# EAGLE board LED_array (EAGLE 9.1.2)
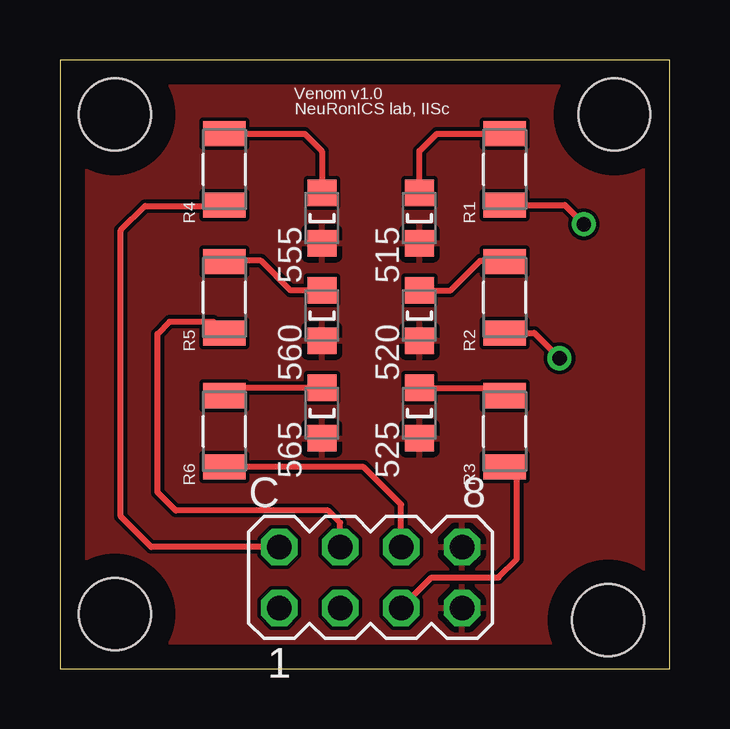
[diagram p0: board, top side]
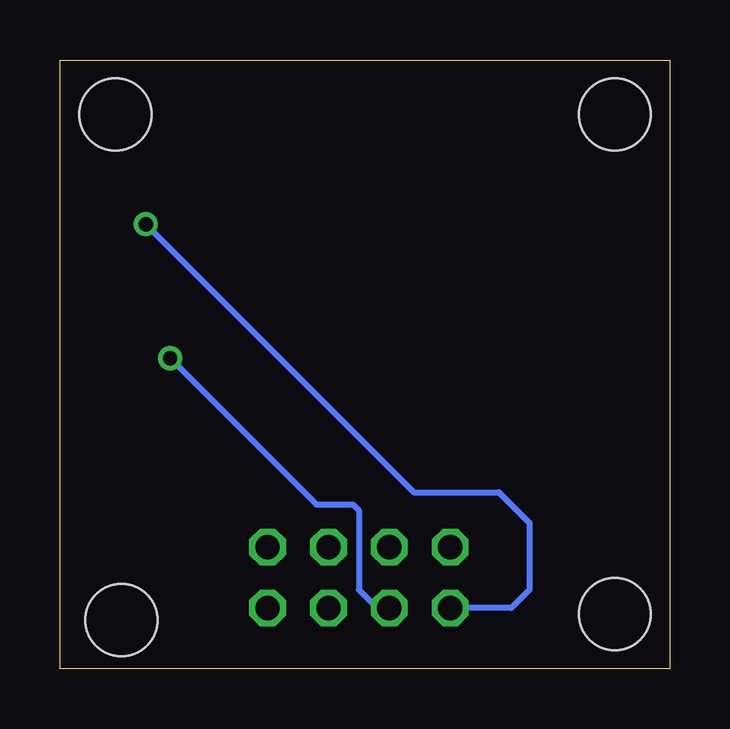
[diagram p1: board, bottom side, seen from below]

Size 25.42 x 25.39 mm. Coordinates in mm from the lower left corner, seen from the top.
Outline: 0,0 25.42,0 25.42,25.39 0,25.39 0,0
Copper layers (1*16): Top 0.035mm / dielectric 1.5mm / Bottom 0.035mm
Design rules "default": minimum track width 6mil, minimum drill 0.35mm, track to track 6mil, track to pad 6mil, pad to pad 6mil, via to via 6mil, smd to smd 6mil, copper to edge 40mil, drill to drill 6mil, minimum pad ring 10mil, minimum via ring 8mil, stop-mask expansion 4mil, vias tented up to drill 0mil, thermal gap 10mil
Holes 3 mm at 2.29,2.29 22.86,2.03 23.11,23.11 2.29,23.11

## Footprints (pad centres in the part's own frame; a part is rotated, then mirrored left to right if it is on the bottom)
WUERTH_ELEKTRONIK_150080GS75000_0 = smd 1.1 x 1.2: 1 -1.05,0; 2 1.05,0
MA04-2 = drill 1.016 octagon: 1 -3.81,-1.27; 2 -3.81,1.27; 3 -1.27,-1.27; 4 -1.27,1.27; 5 1.27,-1.27; 6 1.27,1.27; 7 3.81,-1.27; 8 3.81,1.27
RESC3116X65N = smd 1.05 x 1.77: 1 -1.485,0; 2 1.485,0

## Placement (x,y rotation side)
515  WUERTH_ELEKTRONIK_150080GS75000WUERTH_ELEKTRONIK_150080GS75000_0_0  [WUERTH_ELEKTRONIK_150080GS75000_0]  14.99,18.8 90 top
520  WUERTH_ELEKTRONIK_150080GS75000WUERTH_ELEKTRONIK_150080GS75000_0_0  [WUERTH_ELEKTRONIK_150080GS75000_0]  14.99,14.73 90 top
525  WUERTH_ELEKTRONIK_150080GS75000WUERTH_ELEKTRONIK_150080GS75000_0_0  [WUERTH_ELEKTRONIK_150080GS75000_0]  14.99,10.67 90 top
555  WUERTH_ELEKTRONIK_150080GS75000WUERTH_ELEKTRONIK_150080GS75000_0_0  [WUERTH_ELEKTRONIK_150080GS75000_0]  10.92,18.8 90 top
560  WUERTH_ELEKTRONIK_150080GS75000WUERTH_ELEKTRONIK_150080GS75000_0_0  [WUERTH_ELEKTRONIK_150080GS75000_0]  10.92,14.73 90 top
565  WUERTH_ELEKTRONIK_150080GS75000WUERTH_ELEKTRONIK_150080GS75000_0_0  [WUERTH_ELEKTRONIK_150080GS75000_0]  10.92,10.67 90 top
C  [MA04-2]  12.95,3.81 0 top
R1  100  [RESC3116X65N]  18.54,20.83 90 top
R2  100  [RESC3116X65N]  18.54,15.49 90 top
R3  100  [RESC3116X65N]  18.54,9.91 90 top
R4  150  [RESC3116X65N]  6.86,20.83 90 top
R5  150  [RESC3116X65N]  6.86,15.49 90 top
R6  150  [RESC3116X65N]  6.86,9.91 90 top

## Library data of the parts
515 520 525 555 560 565 = Wuerth Elektronik - 150080GS75000; CIIVA_IDS: 12518865; COLOR: Green; COMPONENT_LINK_1_DESCRIPTION: Manufacturer URL; COMPONENT_LINK_1_URL: http://www.we-online.com; DATASHEET: http://katalog.we-online.com/led/datasheet/150080GS75000.pdf; FOOTPRINT_VARIANT_NAME_0: Manufacturer Recommended; IMPORTED: yes; IMPORTED_FROM: vault; IMPORT_TS: 1521861195; MF: Wuerth Elektronik; MPN: 150080GS75000; PACKAGE: 0805_A; PREFIX: LED; RELEASE_DATE: 1421305883; VAULT_GUID: 7CA29E68-737E-4B72-8298-495A0034E04A; VAULT_REVISION: 176256F5-FDF0-497E-BE5F-A62C8B2BC32C
C = con-lstb; OC_FARNELL: unknown; OC_NEWARK: unknown
R1-R6 = RCS1206150RFKEA; DESCRIPTION: RCS1206 100 150R 1% ET1 E3; DIGI-KEY_PART_NUMBER: 541-10575-1-ND; DIGI-KEY_PURCHASE_URL: https://www.digikey.in/product-detail/en/vishay-dale/RCS1206150RFKEA/541-10575-1-ND/10059941?utm_source=snapeda&utm_medium=aggregator&utm_campaign=symbol; MF: Vishay; MP: RCS1206150RFKEA; PACKAGE: 3116 Vishay

## Nets
1: C.1 R1.1
2: C.3 R2.1
3: C.5 R3.1
4: C.2 R4.1
5: C.4 R5.1
6: C.6 R6.1
GND: 515.1 520.1 525.1 555.1 560.1 565.1 C.7 C.8
N$1: 555.2 R4.2
N$2: 560.2 R5.2
N$3: 565.2 R6.2
N$4: 515.2 R1.2
N$5: 520.2 R2.2
N$6: 525.2 R3.2

## Tracks (layer width: path | path; a pad name or v marks a point on that pad's centre or on a via)
1  (via drill 0.6 pad 1)
  Top 0.254: R1.1 21.04,19.34 v21.84,18.54
  Bottom 0.254: C.1 6.6,2.54 5.84,3.3 5.84,6.1 7.11,7.37 10.67,7.37 21.72,18.41 v21.84,18.54
2  (via drill 0.6 pad 1)
  Top 0.254: R2.1 19.77,14.01 v20.83,12.95
  Bottom 0.254: v20.83,12.95 14.73,6.86 13.21,6.86 12.95,6.6 12.95,3.3 12.19,2.54 C.3
3
  Top 0.254: C.5 15.49,3.81 18.29,3.81 19.05,4.57 19.05,7.91 R3.1
4
  Top 0.254: C.2 3.81,5.08 2.54,6.35 2.54,18.29 3.56,19.3 6.82,19.3 R4.1
5
  Top 0.254: C.4 11.68,6.1 11.18,6.6 4.83,6.6 4.06,7.37 4.06,13.97 4.57,14.48 6.39,14.48 R5.1
6
  Top 0.254: C.6 14.22,6.86 12.66,8.42 R6.1
GND
  pour Top: 0,0 0,25.4 25.4,25.4 25.4,0
N$1
  Top 0.254: R4.2 10.2,22.31 10.92,21.59 555.2
N$2
  Top 0.254: 560.2 9.62,15.78 8.38,17.02 6.9,17.02 R5.2
N$3
  Top 0.254: 565.2 7.18,11.72 R6.2
N$4
  Top 0.254: 515.2 14.99,21.59 15.71,22.31 R1.2
N$5
  Top 0.254: 520.2 16.29,15.78 17.53,17.02 18.5,17.02 R2.2
N$6
  Top 0.254: 525.2 18.21,11.72 R3.2

## Text on the board
tNames: Venom v1.0 | NeuRonICS lab, IISc